# EAGLE board cociclo_huzzah_bergen (EAGLE 7.4.0)
REV: A
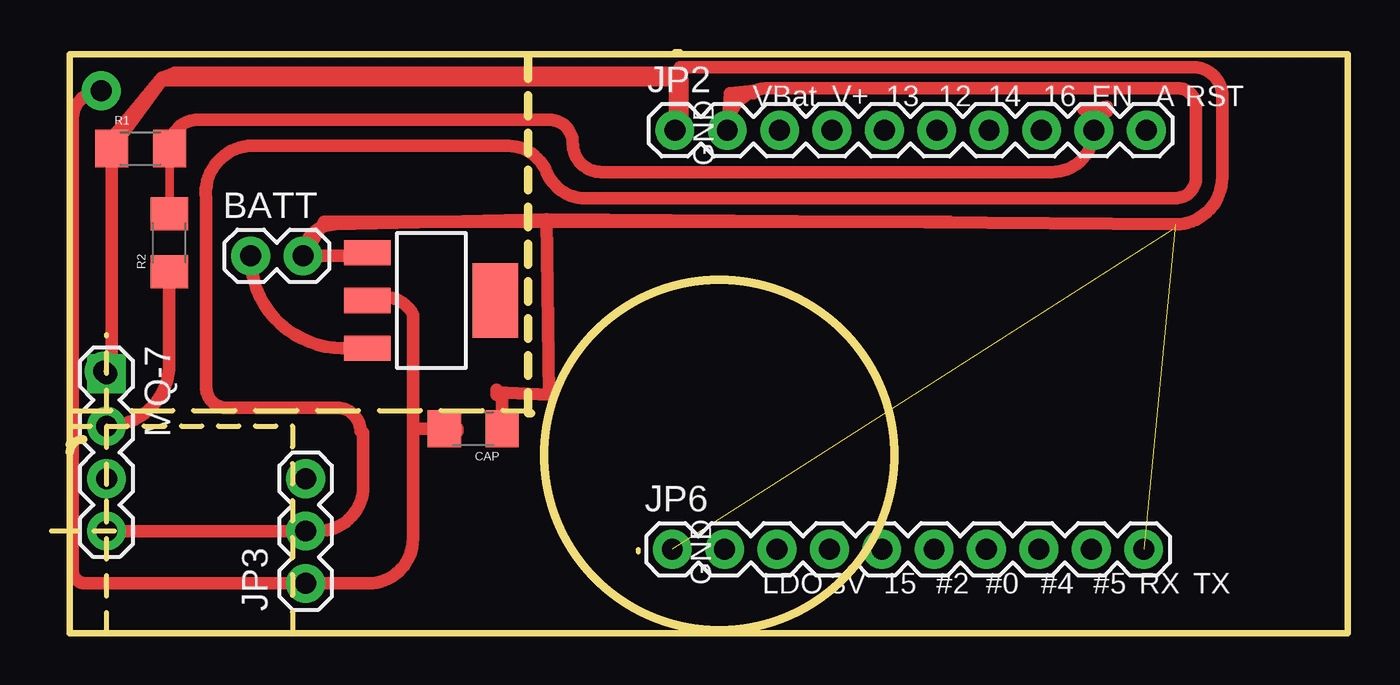
[diagram p0: board, top side]
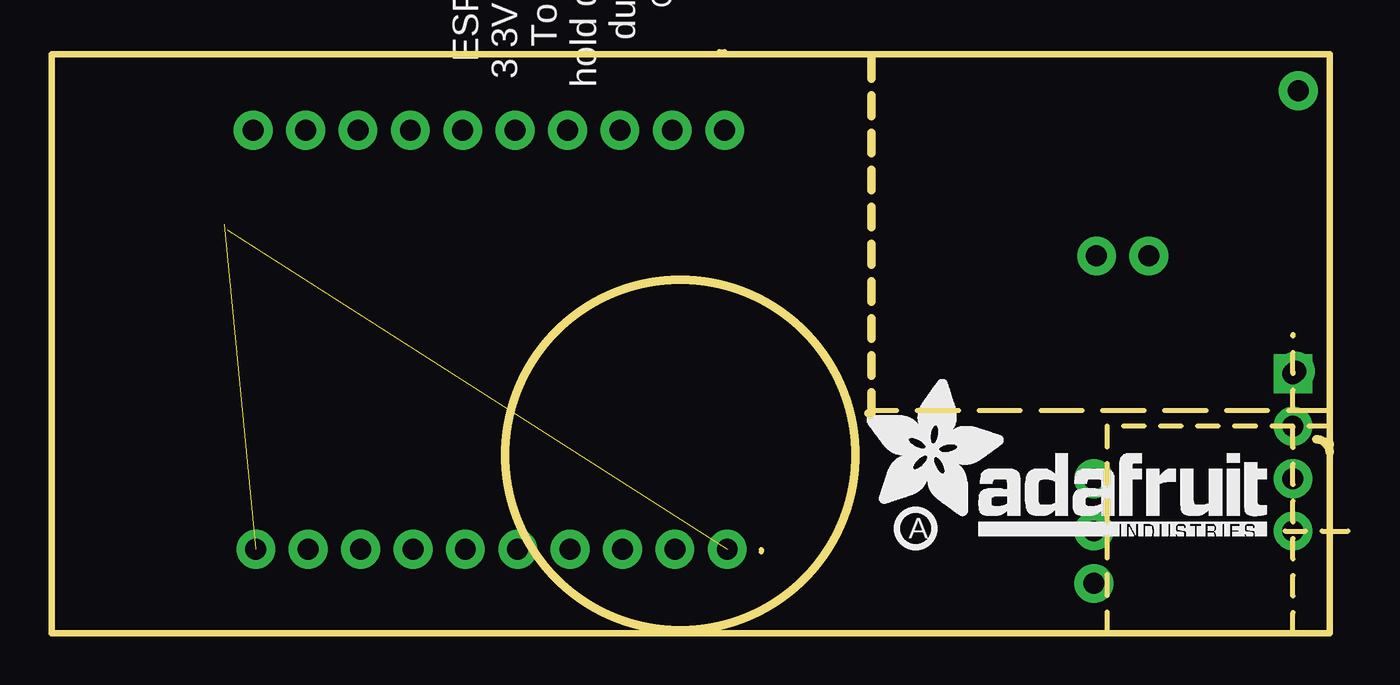
[diagram p1: board, bottom side, seen from below]

Size 62.87 x 28.19 mm. Coordinates in mm from the lower left corner, seen from the top.
Outline: 11.68,0 62.87,0 62.87,28.07 23.11,28.07
Outline: 11.68,0 2.67,0
Outline: 2.67,0 0.89,0
Outline: 0.89,0 0.89,4.95
Outline: 0.89,4.95 0.89,8.76
Outline: 0.89,8.76 0.89,9.14
Outline: 0.89,9.14 0.89,10.03
Outline: 0.89,10.03 0.89,10.79
Outline: 0.89,10.79 0.89,28.07 1.02,28.07
Outline: 1.02,28.07 22.99,28.07
Outline: 22.99,28.07 23.11,28.07
Outline: 0.89,0 0.89,4.95
Outline: 0.89,4.95 0.89,8.76
Outline: 0.89,8.76 0.89,9.14
Outline: 0.89,9.14 0.89,10.03
Outline: 0.89,10.03 0.89,10.79
Outline: 0.89,10.79 22.99,10.79
Outline: 22.99,28.07 1.02,28.07
Outline: 0.89,0 0.89,4.95
Outline: 0.89,4.95 0.89,8.76
Outline: 0.89,8.76 0.89,9.14
Outline: 0.89,9.14 0.89,10.03
Outline: 0.89,10.03 11.68,10.03 11.68,0
Outline: 11.68,0 2.67,0
Outline: 2.67,0 0.89,0
Outline: 2.67,0 2.67,14.48
Outline: 3.05,4.95 0.89,4.95
Outline: 0.89,4.95 0,4.95
Outline: 23.24,10.67 23.11,10.67 23.11,28.07
Outline: 0.89,9.14 arc-90 1.02,9.27
Outline: 0.89,8.76 arc-90 1.52,9.4
Outline: 30.48,28.19 30.23,28.19
Outline: 28.45,4.06 28.45,3.94
Outline: circle at 32.38,8.64 radius 8.48
Copper layers (1*16): Top 0.035mm / dielectric 1.5mm / Bottom 0.035mm
Design rules "adafruit *": minimum track width 10mil, minimum drill 15.5mil, track to track 8mil, track to pad 8mil, pad to pad 8mil, via to via 8mil, smd to smd 8mil, copper to edge 10mil, drill to drill 8mil, minimum pad ring 10mil, minimum via ring 8mil, stop-mask expansion 2mil, vias tented up to drill 20mil, thermal gap 10mil

## Footprints (pad centres in the part's own frame; a part is rotated, then mirrored left to right if it is on the bottom)
1X02 = drill 1.016 pad 1.88: 1 0,0; 2 2.54,0
1206 = smd 1.6 x 1.8: 1 -1.4,0; 2 1.4,0
1X10 = drill 1.016 pad 1.88: 1 0,0; 2 2.54,0; 3 5.08,0; 4 7.62,0; 5 10.16,0; 6 12.7,0; 7 15.24,0; 8 17.78,0; 9 20.32,0; 10 22.86,0
1X03 = drill 1.016 pad 1.88: 1 0,0; 2 2.54,0; 3 5.08,0
1X04 = drill 1.016 pad 1.88 square: 1 0,0 | drill 1.016 pad 1.88: 2 2.54,0; 3 5.08,0; 4 7.62,0
1X01NS-KIT = drill 1.016 pad 1.88: 1 0,0
SOT223 = smd 1.219 x 2.235: 1 -2.311,-3.099; 2 0,-3.099; 3 2.311,-3.099 | smd 3.6 x 2.2: 4 0,3.099

## Placement (x,y rotation side)
BATT  [1X02]  9.65,18.29 0 top
CAP  470pf  [1206]  20.45,9.91 180 top
JP2  [1X10]  30.23,24.38 0 top
JP3  VIN  [1X03]  12.32,2.41 90 top
JP6  [1X10]  30.1,4.06 0 top
MQ-7  G A0 D0 V  [1X04]  2.67,12.57 270 top
PWR+  VIN  [1X01NS-KIT]  2.41,26.29 0 top
PWR-  GND  [1X01NS-KIT]  2.54,12.7 180 top
R1  2k  [1206]  4.32,23.5 0 top
R2  3k  [1206]  5.71,18.92 90 top
U2  V_REG_317SMD  [SOT223]  18.41,16.13 270 top
U$2  [HUZZAHLOGO]  22.48,30.61 0 bottom
U$12  [ADAFRUIT_TEXT_20MM]  23.5,4.7 0 bottom
U$13  [PCBFEAT-REV-040]  20.95,5.08 0 bottom

## Library data of the parts
BATT JP3 MQ-7 PWR+ PWR- = SparkFun-Connectors
CAP R1 R2 = SparkFun-Resistors
JP2 JP6 = SparkFun-Connectors; PROD_ID: CONN-11563
U2 = SparkFun-PowerIC
U$2 U$12 U$13 = microbuilder

## Nets
3.3V: JP2.3
ADC: JP2.9 R1.2 R2.2
CH_PD: JP6.3
GND: BATT.2 JP2.1 JP6.10 MQ-7.1 PWR-.1 R1.1 U2.1
GPIO0: JP2.6
GPIO2: JP2.5
GPIO4: JP2.7
GPIO5: JP2.8
GPIO13: JP6.7
GPIO14: JP6.5
GPIO15: JP2.4
GPIO16: JP6.4
LDO_EN: JP2.2 JP3.2 MQ-7.4
N$1: MQ-7.2 R2.1
N$2: JP6.2
N$3: JP3.1 PWR+.1 U2.2
N$6: BATT.1 U2.3
RESET_5V: JP6.1
VBAT: JP6.9
VIN: JP6.8

## Tracks (layer width: path | path; a pad name or v marks a point on that pad's centre or on a via)
ADC
  Top 0.406: R1.2 5.72,20.44 arc90 6.1,20.07 5.97,20.07 arc-90 R2.2
  Top 0.61: JP2.9 arc-90 48.51,22.35 26.67,22.35 arc-90 25.27,23.75 arc90 24.13,24.89 7.11,24.89 arc90 R1.2
GND  (2 unrouted)
  Top 0.406: 2.92,13.08 arc-90 PWR-.1 | 2.92,24 R1.1
  Top 0.61: PWR-.1 arc90 2.92,13.08 R1.1 5.33,26.8 30.23,26.8 30.23,26.67 | 30.23,26.67 JP2.1 | U2.1 arc-90 15.16,18.29 BATT.2 arc-90 13.72,19.81 24,20.07 | 24,20.07 54.48,19.81 arc90 56.77,22.1 56.77,26.04 arc90 55.37,27.43 30.48,27.43 30.48,26.92 arc-90 30.23,26.67 | 24,20.07 24.13,11.56 21.59,11.68 21.59,11.81 | 43.56,19.94 13.21,19.94 12.32,18.41
LDO_EN
  Top 0.61: MQ-7.4 JP3.2 12.95,4.95 arc90 15.11,7.11 15.11,9.65 arc90 14.99,9.78 arc90 13.84,10.92 8.51,10.92 arc-90 7.49,11.94 7.49,21.08 arc-90 9.52,23.62 21.97,23.62 arc-71 24,22.35 arc67 25.91,21.08 54.48,21.08 arc90 55.5,22.1 55.5,25.53 arc90 54.61,26.42 34.8,26.42 arc90 JP2.2
N$1
  Top 0.61: R2.1 5.71,13.08 arc-90 MQ-7.2
N$3
  Top 0.61: U2.2 arc-90 17.53,15.44 17.53,4.57 arc-90 15.37,2.41 JP3.1 1.65,2.41 arc-90 1.02,3.05 1.02,24.89 arc-90 PWR+.1
N$6
  Top 0.61: U2.3 14.12,13.82 arc-90 BATT.1
N$7
  Top 0.61: 17.65,9.91 19.56,9.91 19.56,9.78 19.68,9.78 19.68,9.91
N$8
  Top 0.61: 21.59,11.56 21.84,11.56 21.84,9.91
N$9
  Top 0.61: 30.35,26.92 arc90 30.1,27.18 5.97,27.18 5.33,26.92 3.05,24.13 3.05,23.62
N$10
  Top 0.61: 32.89,25.78 32.77,24.26 32.89,26.16 34.04,26.29 34.04,26.16
N$11
  Top 0.61: 30.61,26.8 30.61,24.38 30.48,24
N$12
  Top 0.61: 50.17,25.27 51.18,25.27 51.18,25.53 50.04,25.4
RESET_5V  (1 unrouted)

## Text on the board
tPlace: VBat | V+ | 13 | 12 | 14 | 16 | EN | A | RST | GND | GND | LDO | 3V | 15 | #2 | #0 | #4 | #5 | RX | TX
bPlace: Contains FCC ID / 2ADUIESP-12 | ESP8266 WiFi / 3.3V Logic Level / To Bootload: / hold down GPIO0 / during reset